# Altium PCB Board_PCB.PcbDoc (part 2 of 3)
Units mm, origin at the board's own origin, x right, y up, seen from the top; angles counter-clockwise.
Board outline 122.55 x 106.6 mm, 2 copper layers (Top Layer, Bottom Layer); 120 components, 188 nets, 670 pads, 282 vias.
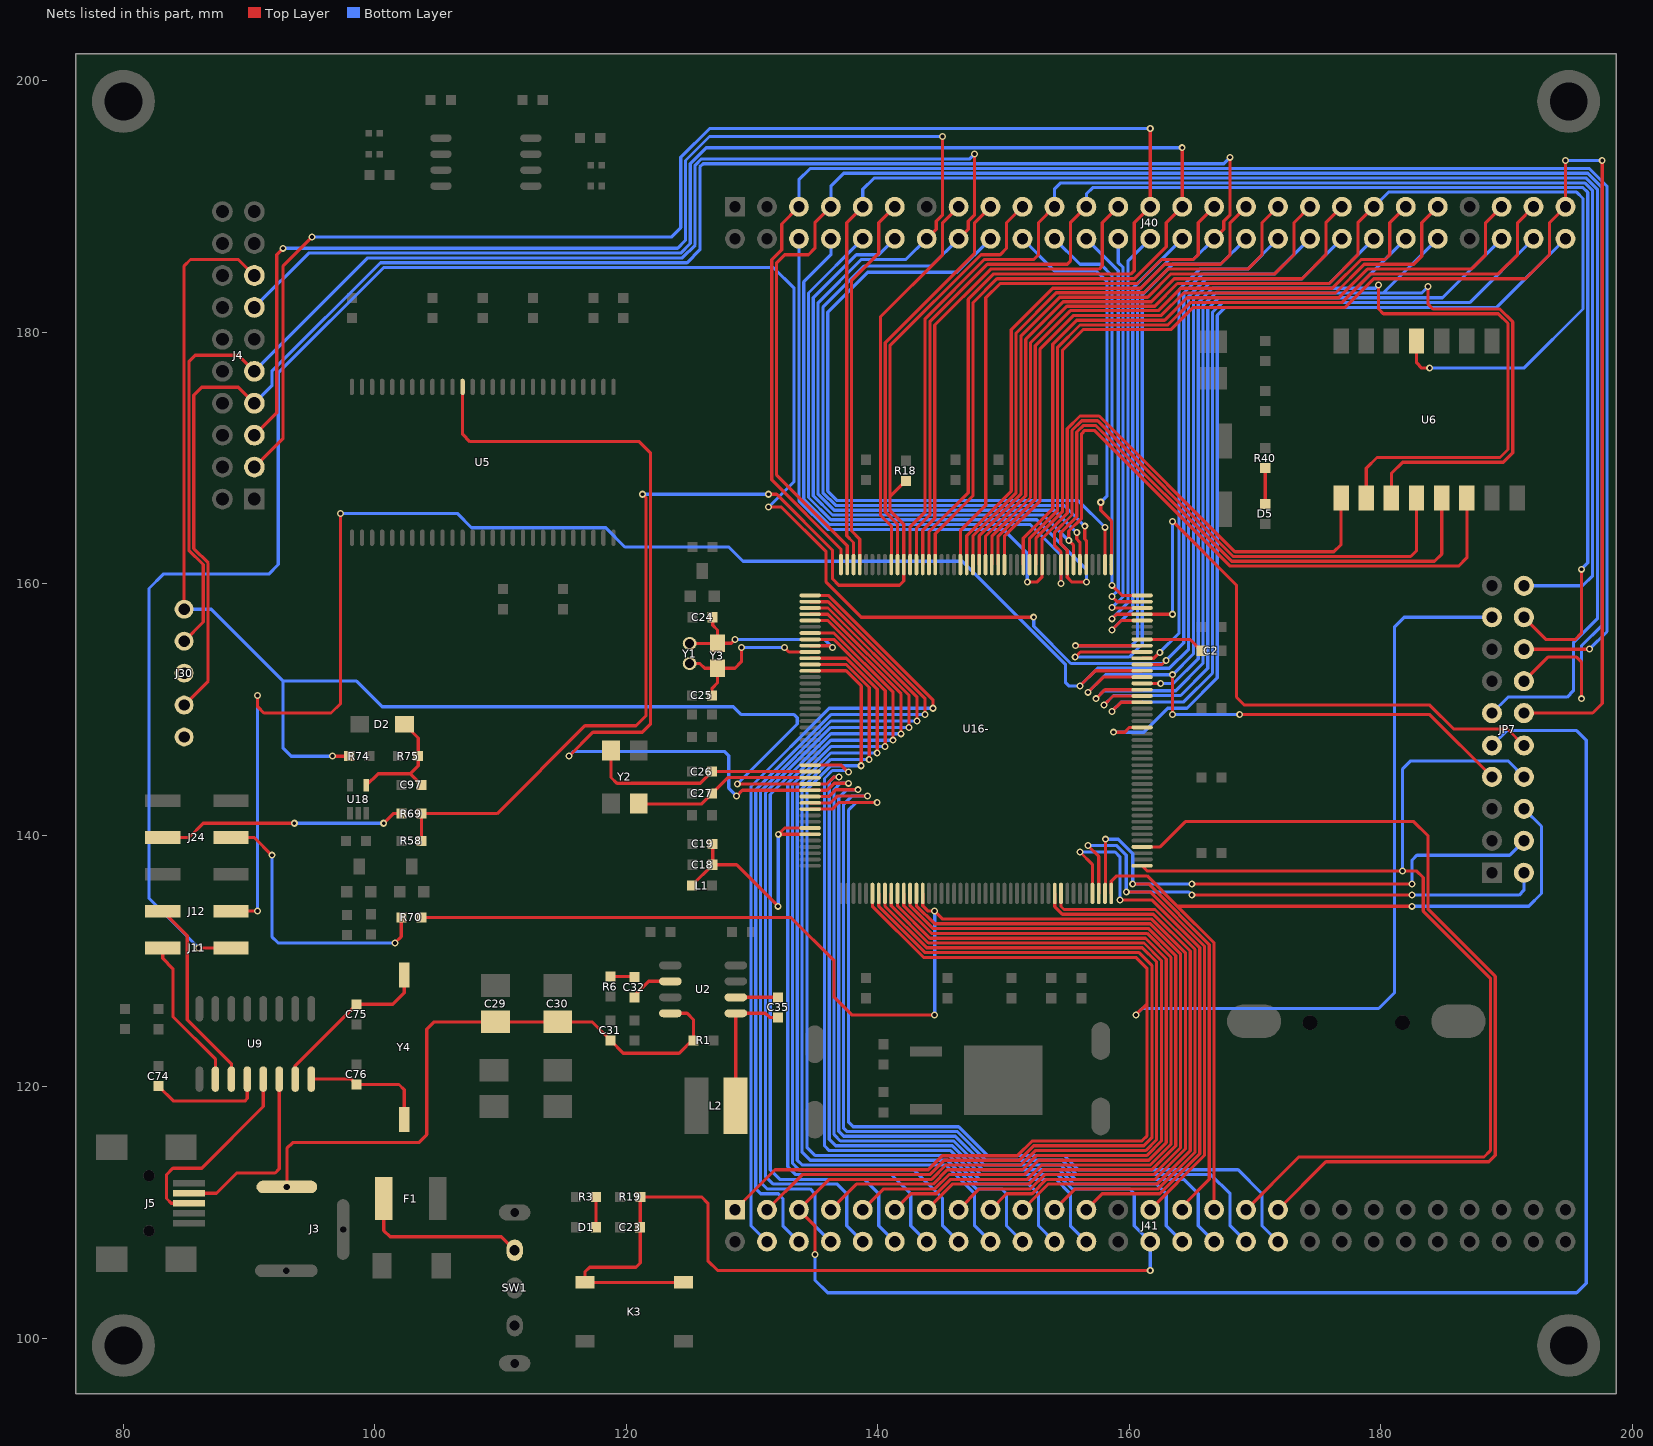
[diagram p2: the nets of this part, all layers, seen from the top]

## Via types
v1: diameter 0.56, hole 0.305, Top Layer to Bottom Layer, tented both sides, 282 vias

## Nets (pads, with @x,y where several pads share a name; then routed paths per layer and width w, separated by ;. In a path a pad name is that pad's centre, name@x,y a point inside that pad or via, vN(x,y) a via of type N, cw(c..) or ccw(c..) an arc to the next point about the centre after c; other vN are vias at no path point) (continued)
NetC2_1: C2.1 U16-.125 | length 5.1
  Top Layer w0.254: U16-.125@161.024,155.59 164.831,155.59 C2.1@165.735,154.686
NetC18_1: C18.1 C19.1 L1.1 U16-.38 U16-.39 | length 21.6
  Top Layer w0.254: L1.1@125.222,136.017 C18.1@126.873,137.668 ; C19.1@126.873,139.319 C18.1@126.873,137.668 ; v1(132.08,134.366) 128.778,137.668 C18.1@126.873,137.668 ; U16-.39@134.624,140.09 v1(132.089,140.09) 132.589,140.59 U16-.38@134.624,140.59
  Bottom Layer w0.254: v1(132.08,134.366) 132.089,134.375 v1(132.089,140.09)
NetC23_2: C23.2 J4.15 J30.1 J41.28 K3.3 K3.4 R19.1 R74.2 U16-.31 | length 238.7
  Top Layer w0.254: J30.1@84.836,157.988 84.836,185.293 85.344,185.801 89.154,185.801 J4.15@90.424,184.531 ; v1(96.647,146.304) R74.2@97.968,146.304 ; R19.1@121.107,111.241 C23.2@121.107,108.839 121.107,105.994 120.777,105.664 117.094,105.664 116.713,105.283 K3.4@116.713,104.458 K3.3@124.562,104.458 ; R19.1@121.118,111.252 125.984,111.252 126.492,110.744 126.492,106.172 127.254,105.41 v1(161.671,105.41) ; v1(128.833,144.09) U16-.31@134.624,144.09 135.962,144.09 136.525,144.653 v1(136.906,144.653)
  Bottom Layer w0.254: J30.1@84.836,157.988 86.995,157.988 92.71,152.273 ; v1(96.647,146.304) 93.345,146.304 92.71,146.939 92.71,152.273 ; v1(128.833,144.09) 133.604,148.861 133.604,149.352 133.349,149.607 129.158,149.607 128.524,150.241 100.584,150.241 98.552,152.273 92.71,152.273 ; v1(136.906,144.653) 136.525,144.653 136.144,144.272 136.144,115.824 136.652,115.316 145.923,115.316 148.209,113.03 154.305,113.03 155.448,111.887 160.02,111.887 160.401,111.506 160.401,108.966 J41.28@161.671,107.696 v1(161.671,105.41)
NetC24_1: C24.1 U16-.9 Y1.2 Y3.2 | length 15.8
  Top Layer w0.254: Y1.2@125.04,155.267 Y3.2@127.232,155.267 ; C24.1@126.873,157.353 126.873,156.718 127.254,156.337 Y3.2@127.254,155.289 128.365,155.289 v1(128.651,155.575) ; U16-.9@134.624,155.09 136.248,155.09 v1(136.398,154.94)
  Bottom Layer w0.254: v1(128.651,155.575) 135.786,155.575 136.398,154.963 v1(136.398,154.94)
NetC25_1: C25.1 U16-.10 Y1.1 Y3.1 | length 13.6
  Top Layer w0.254: Y1.1@125.04,153.667 125.86,153.667 126.238,153.289 Y3.1@127.254,153.289 ; C25.1@126.823,151.13 126.823,151.715 127.254,152.146 Y3.1@127.254,153.289 ; v1(129.159,154.94) 129.159,153.797 128.651,153.289 Y3.1@127.254,153.289 ; v1(132.588,154.94) 132.938,154.59 U16-.10@134.624,154.59
  Bottom Layer w0.254: v1(129.159,154.94) v1(132.588,154.94)
NetC26_2: C26.2 U16-.29 Y2.1 | length 18.5
  Top Layer w0.254: Y2.1@118.788,146.753 118.788,144.61 119.253,144.145 125.887,144.145 C26.2@126.822,145.08 ; C26.2@126.832,145.09 U16-.29@134.624,145.09
NetC27_2: C27.2 U16-.30 Y2.3 | length 14.8
  Top Layer w0.254: Y2.3@120.988,142.494 125.974,142.494 C27.2@126.822,143.342 128.077,144.597 134.624,144.597 U16-.30@134.624,144.59 ; Y2.3@120.988,142.68 Y2.3@121.174,142.494
NetC29_1: C29.1 C30.1 C31.1 J3.1 R1.1 U2.8 | length 49.6
  Top Layer w0.254: J3.1@93.01,112.044 93.01,115.108 93.472,115.57 103.505,115.57 104.14,116.205 104.14,124.587 104.722,125.169 C29.1@109.601,125.169 C30.1@114.554,125.169 117.274,125.169 C31.1@118.745,123.698 119.761,122.682 124.206,122.682 125.349,123.825 125.349,125.349 124.841,125.857 U2.8@123.511,125.857
NetC32_1: C32.1 U2.6 | length 3.5
  Top Layer w0.254: C32.1@120.65,127.127 120.65,127.254 121.793,128.397 U2.6@123.511,128.397
NetC32_2: C32.2 R6.1 | length 1.9
  Top Layer w0.254: R6.1@118.745,128.778 C32.2@120.599,128.778
NetC35_1: C35.1 L2.1 U2.1 | length 10.9
  Top Layer w0.254: L2.1@128.711,118.491 U2.1@128.711,125.857 131.064,125.857 131.395,125.526 C35.1@132.08,125.526
NetC35_2: C35.2 U2.2 | length 3.4
  Top Layer w0.254: U2.2@128.711,127.127 C35.2@132.08,127.126
NetC74_2: C74.2 U9.4 | length 9.2
  Top Layer w0.254: C74.2@82.804,120.066 83.998,118.872 89.662,118.872 89.865,119.075 U9.4@89.865,120.625
NetC75_2: C75.2 U9.7 Y4.2 | length 13.6
  Top Layer w0.254: U9.7@93.675,120.625 93.675,121.691 C75.2@98.552,126.568 101.422,126.568 102.349,127.495 Y4.2@102.349,128.905
NetC76_2: C76.2 U9.8 Y4.1 | length 10.1
  Top Layer w0.254: U9.8@94.945,120.625 98.12,120.625 C76.2@98.552,120.193 101.93,120.193 102.349,119.774 Y4.1@102.349,117.405
NetC97_2: C97.2 D2.1 R75.2 U18.4 | length 9.8
  Top Layer w0.254: U18.4@99.329,143.975 100.261,144.907 102.819,144.907 ; D2.1@102.362,148.844 103.454,147.752 R75.2@103.454,146.304 103.454,145.542 102.819,144.907 ; C97.2@103.708,144.018 102.819,144.907
NetD1_A: D1.A R3.2 | length 2.4
  Top Layer w0.254: D1.A@117.602,108.839 R3.2@117.601,111.252
NetD5_A: D5.A R40.2 | length 2.8
  Top Layer w0.254: D5.A@170.815,166.37 R40.2@170.815,169.215
NetF1_1: F1.1 SW1.3 | length 13.6
  Top Layer w0.254: F1.1@100.72,111.125 100.72,108.576 101.219,108.077 110.061,108.077 SW1.3@111.125,107.013
NetJ4_3: J4.3 J40.27 U16-.162 | length 142.1
  Top Layer w0.254: J4.3@90.424,169.291 92.71,171.577 92.71,185.293 v1(94.996,187.579) ; U16-.162@144.074,161.54 144.074,164.14 147.193,167.259 147.193,182.626 149.225,184.658 160.147,184.658 160.401,184.912 160.401,188.722 J40.27@161.671,189.992 v1(161.671,196.215)
  Bottom Layer w0.254: v1(94.996,187.579) 123.571,187.579 124.333,188.341 124.333,193.929 126.619,196.215 v1(161.671,196.215)
NetJ4_5: J4.5 J40.14 U16-.138 | length 134.8
  Top Layer w0.254: J4.5@90.424,171.831 92.202,173.609 92.202,186.182 v1(92.71,186.69) ; J40.14@143.891,187.452 144.653,188.214 144.653,188.849 145.161,189.357 v1(145.161,195.58) ; v1(155.829,164.084) 155.829,163.576 156.074,163.331 U16-.138@156.074,161.54
  Bottom Layer w0.254: v1(92.71,186.69) 124.079,186.69 124.714,187.325 124.714,193.675 126.619,195.58 v1(145.161,195.58) ; J40.14@143.891,187.452 142.24,185.801 138.684,185.801 135.255,182.372 135.255,167.132 136.525,165.862 154.051,165.862 v1(155.829,164.084)
NetJ4_7: J4.7 J30.4 J40.32 U16-.124 | length 174.7
  Top Layer w0.254: J30.4@84.836,150.368 86.741,152.273 86.741,161.671 85.598,162.814 85.598,175.006 86.233,175.641 89.154,175.641 J4.7@90.424,174.371 ; v1(155.725,155.09) U16-.124@161.024,155.09 ; J40.32@166.751,187.452 167.513,188.214 167.513,188.849 168.021,189.357 v1(168.021,193.929)
  Bottom Layer w0.254: J4.7@90.424,174.371 91.821,175.768 91.821,176.911 100.457,185.547 124.841,185.547 125.857,186.563 125.857,193.167 126.111,193.421 167.513,193.421 v1(168.021,193.929) ; v1(155.725,155.09) 160.17,155.09 160.655,155.575 160.655,183.261 163.195,185.801 165.1,185.801 J40.32@166.751,187.452
NetJ4_9: J4.9 J30.2 J40.16 U16-.137 | length 157.5
  Top Layer w0.254: J30.2@84.836,155.448 86.36,156.972 86.36,161.544 85.217,162.687 85.217,177.673 85.725,178.181 89.154,178.181 J4.9@90.424,176.911 ; J40.16@146.431,187.452 147.193,188.214 147.193,188.849 147.701,189.357 v1(147.701,194.183) ; v1(156.464,164.592) 156.464,163.576 156.591,163.449 U16-.137@156.591,161.557
  Bottom Layer w0.254: J4.9@90.424,176.911 99.441,185.928 124.46,185.928 125.476,186.944 125.476,193.294 125.984,193.802 147.32,193.802 v1(147.701,194.183) ; J40.16@146.431,187.452 144.272,185.293 138.938,185.293 135.636,181.991 135.636,167.259 136.652,166.243 154.813,166.243 v1(156.464,164.592)
NetJ4_13: J4.13 J40.29 U16-.161 | length 130.5
  Top Layer w0.254: U16-.161@144.574,161.54 144.567,161.547 144.567,163.998 147.574,167.005 147.574,182.372 149.479,184.277 160.401,184.277 162.941,186.817 162.941,188.722 J40.29@164.211,189.992 v1(164.211,194.691)
  Bottom Layer w0.254: J4.13@90.424,181.991 94.742,186.309 124.333,186.309 125.095,187.071 125.095,193.421 126.365,194.691 v1(164.211,194.691)
NetJ5_2: J5.2 U9.6 | length 15.1
  Top Layer w0.254: J5.2@85.242,111.544 87.414,111.544 89.027,113.157 92.075,113.157 92.405,113.487 U9.6@92.405,120.625
NetJ5_3: J5.3 U9.5 | length 16
  Top Layer w0.254: J5.3@85.242,110.744 83.82,110.744 83.439,111.125 83.439,113.03 83.947,113.538 86.233,113.538 91.135,118.44 U9.5@91.135,120.625
NetJ11_1: J11.1 J40.38 U16-.121 | length 204.9
  Top Layer w0.254: v1(85.99,131.053) J11.1@88.567,131.053 ; v1(131.318,166.116) 132.334,166.116 135.89,162.56 135.89,160.147 138.684,157.353 v1(152.4,157.353) ; U16-.121@161.024,153.59 162.607,153.59 v1(162.941,153.924)
  Bottom Layer w0.254: v1@85.979,131.064 82.042,135.001 82.042,159.639 83.185,160.782 91.567,160.782 92.329,161.544 92.329,176.784 100.711,185.166 131.699,185.166 133.35,183.515 133.35,168.148 v1(131.318,166.116) ; v1(152.4,157.353) 152.4,156.63 155.36,153.67 162.687,153.67 v1(162.941,153.924) 164.338,155.321 164.338,183.134 165.862,184.658 171.577,184.658 J40.38@174.371,187.452
NetJ11_2: J11.2 U9.2 | length 12.2
  Top Layer w0.254: J11.2@83.137,131.053 83.137,130.223 83.947,129.413 83.947,125.603 87.325,122.225 U9.2@87.325,120.625
NetJ12_1: J12.1 J40.40 U16-.120 | length 165.2
  Top Layer w0.254: J12.1@88.567,133.974 88.556,133.985 v1(90.678,133.985) ; v1(90.678,151.13) 90.678,150.241 91.186,149.733 96.52,149.733 97.282,150.495 v1(97.282,165.608) ; v1(156.083,151.892) 157.281,153.09 U16-.120@161.024,153.09
  Bottom Layer w0.254: v1(90.678,133.985) v1(90.678,151.13) ; v1(97.282,165.608) 106.553,165.608 107.696,164.465 118.364,164.465 119.888,162.941 128.143,162.941 129.286,161.798 146.731,161.798 154.94,153.589 154.94,152.146 155.194,151.892 v1(156.083,151.892) 157.48,153.289 163.195,153.289 164.719,154.813 164.719,182.88 166.116,184.277 173.736,184.277 J40.40@176.911,187.452
NetJ12_2: J12.2 U9.3 | length 15.6
  Top Layer w0.254: J12.2@83.137,133.974 85.09,132.021 85.09,125.349 88.595,121.844 U9.3@88.595,120.625
NetJ24_1: J24.1 R69.2 | length 19.8
  Top Layer w0.254: J24.1@83.137,139.838 85.228,139.838 86.36,140.97 v1(93.599,140.97) ; v1(100.711,140.97) 101.473,141.732 R69.2@102.109,141.732
  Bottom Layer w0.254: v1(93.599,140.97) v1(100.711,140.97)
NetJ24_2: J24.2 R70.1 | length 22.5
  Top Layer w0.254: J24.2@88.567,139.838 90.413,139.838 v1(91.821,138.43) ; v1(101.6,131.445) 102.108,131.953 R70.1@102.108,133.477
  Bottom Layer w0.254: v1(91.821,138.43) 91.821,131.953 92.329,131.445 v1(101.6,131.445)
NetJ30_3: J30.3
NetJ30_5: J30.5
NetJ40_5: J40.5 JP7.16 U16-.176 | length 141.6
  Top Layer w0.254: J40.5@133.731,189.992 132.363,188.624 132.363,186.584 131.572,185.794 131.572,168.275 137.074,162.773 U16-.176@137.074,161.54 ; JP7.16@191.389,154.813 v1(196.596,154.813)
  Bottom Layer w0.254: J40.5@133.731,189.992 133.731,192.151 134.62,193.04 196.596,193.04 197.993,191.643 197.993,156.21 v1(196.596,154.813)
NetJ40_6: J40.6 U6.8 U16-.144 | length 87.6
  Top Layer w0.254: v1(151.892,160.147) 152.654,160.147 153.074,160.567 U16-.144@153.074,161.54 153.074,163.615 155.067,165.608 155.067,172.339 156.083,173.355 157.607,173.355 168.402,162.56 176.276,162.56 176.85,163.134 U6.8@176.85,166.824
  Bottom Layer w0.254: J40.6@133.731,187.452 133.731,166.624 136.017,164.338 149.987,164.338 151.892,162.433 v1(151.892,160.147)
NetJ40_7: J40.7 JP7.14 U16-.175 | length 147.3
  Top Layer w0.254: J40.7@136.271,189.992 135.001,188.722 135.001,186.69 134.493,186.182 132.588,186.182 131.953,185.547 131.953,168.656 137.574,163.035 U16-.175@137.574,161.54 ; JP7.14@191.389,152.273 193.294,154.178 195.58,154.178 195.961,153.797 v1(195.961,150.876)
  Bottom Layer w0.254: J40.7@136.271,189.992 136.271,191.643 137.287,192.659 196.469,192.659 197.612,191.516 197.612,156.718 195.961,155.067 v1(195.961,150.876)
NetJ40_8: J40.8 U6.11 U16-.141 | length 95.7
  Top Layer w0.254: v1(154.574,160.035) U16-.141@154.574,161.54 154.574,162.545 154.051,163.068 154.051,164.084 155.448,165.481 155.448,172.212 156.21,172.974 157.48,172.974 168.275,162.179 182.372,162.179 182.85,162.657 U6.11@182.85,166.824
  Bottom Layer w0.254: J40.8@136.271,187.452 136.271,186.182 134.112,184.023 134.112,166.751 136.144,164.719 152.146,164.719 154.574,162.291 v1(154.574,160.035)
NetJ40_9: J40.9 JP7.11 U16-.174 | length 137.6
  Top Layer w0.254: U16-.174@138.074,161.54 138.074,163.297 137.541,163.83 137.541,188.722 J40.9@138.811,189.992
  Bottom Layer w0.254: J40.9@138.811,189.992 138.811,191.389 139.7,192.278 196.342,192.278 197.231,191.389 197.231,157.226 195.326,155.321 195.326,151.511 194.818,151.003 190.119,151.003 JP7.11@188.849,149.733
NetJ40_10: J40.10 U6.12 U16-.140 | length 100.2
  Top Layer w0.254: v1(156.591,160.147) 155.448,160.147 155.074,160.521 U16-.140@155.074,161.54 155.074,162.68 154.559,163.195 154.559,164.084 155.829,165.354 155.829,172.085 156.337,172.593 157.353,172.593 168.148,161.798 184.277,161.798 184.85,162.371 U6.12@184.85,166.824
  Bottom Layer w0.254: J40.10@138.811,187.452 134.493,183.134 134.493,166.878 136.271,165.1 152.654,165.1 156.591,161.163 v1(156.591,160.147)
NetJ40_11: J40.11 U16-.173 | length 30.1
  Top Layer w0.254: U16-.173@138.574,161.54 138.574,163.559 137.922,164.211 137.922,184.15 140.081,186.309 140.081,188.722 J40.11@141.351,189.992
NetJ40_12: J40.12 U6.13 U16-.139 | length 97.2
  Top Layer w0.254: U16-.139@155.575,161.541 155.575,163.068 v1(155.194,163.449) 155.194,164.211 156.21,165.227 156.21,171.958 156.464,172.212 157.226,172.212 168.021,161.417 186.182,161.417 186.85,162.085 U6.13@186.85,166.824
  Bottom Layer w0.254: J40.12@141.351,187.452 140.081,186.182 138.303,186.182 134.874,182.753 134.874,167.005 136.398,165.481 153.162,165.481 v1(155.194,163.449)
NetJ40_15: J40.15 U16-.168 | length 31.4
  Top Layer w0.254: U16-.168@141.074,161.54 141.096,161.562 141.096,164.593 140.208,165.481 140.208,181.229 145.161,186.182 145.161,188.722 J40.15@146.431,189.992
NetJ40_17: J40.17 U16-.167 | length 32.3
  Top Layer w0.254: U16-.167@141.574,161.54 141.574,164.75 140.589,165.735 140.589,179.197 147.701,186.309 147.701,188.722 J40.17@148.971,189.992
NetJ40_18: J40.18 U16-.134 | length 55.8
  Top Layer w0.254: U16-.134@158.074,161.54 v1(158.074,164.506)
  Bottom Layer w0.254: J40.18@148.971,187.452 146.304,184.785 139.192,184.785 136.017,181.61 136.017,167.386 136.779,166.624 155.956,166.624 v1(158.074,164.506)
NetJ40_19: J40.19 R18.2 R58.2 R69.1 U16-.166 | length 103.5
  Top Layer w0.254: R58.2@103.708,139.573 R69.1@103.709,141.732 109.728,141.732 116.713,148.717 120.777,148.717 121.566,149.506 121.566,166.851 v1(121.285,167.132) ; v1(131.318,167.132) 131.953,167.132 136.398,162.687 136.398,160.401 136.906,159.893 141.732,159.893 142.074,160.235 U16-.166@142.074,161.54 142.074,164.758 140.97,165.862 140.97,166.929 ; R18.2@142.24,168.199 140.97,166.929 ; J40.19@151.511,189.992 150.241,188.722 150.241,186.69 149.733,186.182 148.209,186.182 140.97,178.943 140.97,166.929
  Bottom Layer w0.254: v1(121.285,167.132) v1(131.318,167.132)
NetJ40_20: J40.20 U16-.133 | length 31.2
  Top Layer w0.254: v1(157.734,166.497) 157.734,165.862 158.581,165.015 158.581,161.547 U16-.133@158.574,161.54
  Bottom Layer w0.254: J40.20@151.511,187.452 154.051,184.912 157.353,184.912 158.242,184.023 158.242,167.005 v1(157.734,166.497)
NetJ40_21: J40.21 JP7.20 U16-.165 | length 116.6
  Top Layer w0.254: U16-.165@142.574,161.54 142.574,164.545 143.764,165.735 143.764,181.102 148.463,185.801 152.4,185.801 152.781,186.182 152.781,188.722 J40.21@154.051,189.992
  Bottom Layer w0.254: J40.21@154.051,189.992 154.051,191.389 154.559,191.897 196.215,191.897 196.85,191.262 196.85,160.655 196.048,159.853 JP7.20@191.389,159.853
NetJ40_22: J40.22 U16-.132 | length 33.2
  Top Layer w0.254: v1(158.623,159.893) 159.426,159.09 U16-.132@161.024,159.09
  Bottom Layer w0.254: J40.22@154.051,187.452 156.083,185.42 157.734,185.42 158.623,184.531 v1(158.623,159.893)
NetJ40_23: J40.23 JP7.18 U16-.164 | length 119.8
  Top Layer w0.254: U16-.164@143.074,161.54 143.074,164.41 144.145,165.481 144.145,180.848 148.717,185.42 155.067,185.42 155.321,185.674 155.321,188.722 J40.23@156.591,189.992 ; JP7.18@191.389,157.353 193.167,155.575 195.453,155.575 195.961,156.083 v1(195.961,161.163)
  Bottom Layer w0.254: J40.23@156.591,189.992 156.591,191.008 157.099,191.516 196.088,191.516 196.469,191.135 196.469,161.671 v1(195.961,161.163)
NetJ40_24: J40.24 U16-.131 | length 32.3
  Top Layer w0.254: v1(158.623,159.004) 159.037,158.59 U16-.131@161.024,158.59
  Bottom Layer w0.254: J40.24@156.591,187.452 159.131,184.912 159.131,159.512 v1(158.623,159.004)
NetJ40_25: J40.25 U16-.163 | length 40
  Top Layer w0.254: U16-.163@143.574,161.54 143.574,164.275 144.526,165.227 144.526,180.594 148.971,185.039 157.607,185.039 157.861,185.293 157.861,188.722 J40.25@159.131,189.992
NetJ40_26: J40.26 U16-.130 | length 32.2
  Top Layer w0.254: v1@158.648,158.09 U16-.130@161.024,158.09
  Bottom Layer w0.254: v1(158.623,158.115) 159.512,159.004 159.512,185.166 159.131,185.547 J40.26@159.131,187.452
NetJ40_28: J40.28 JP7.10 U16-.129 | length 84.4
  Top Layer w0.254: v1(158.623,157.226) 158.987,157.59 U16-.129@161.024,157.59 v1(163.432,157.59) ; v1(163.449,164.973) 168.529,159.893 168.529,151.003 169.164,150.368 183.896,150.368 185.801,148.463 190.079,148.463 JP7.10@191.389,147.153
  Bottom Layer w0.254: v1(158.623,157.226) 159.893,158.496 159.893,185.674 J40.28@161.671,187.452 ; v1(163.432,157.59) 163.449,157.607 v1(163.449,164.973)
NetJ40_30: J40.30 U16-.128 | length 36.1
  Top Layer w0.254: v1(158.623,156.337) 159.376,157.09 U16-.128@161.024,157.09
  Bottom Layer w0.254: v1(158.623,156.337) 160.274,157.988 160.274,183.515 J40.30@164.211,187.452
NetJ40_31: J40.31 U16-.157 | length 44.7
  Top Layer w0.254: U16-.157@146.574,161.54 146.574,164.227 148.59,166.243 148.59,182.753 149.733,183.896 160.655,183.896 162.56,185.801 165.1,185.801 165.481,186.182 165.481,188.722 J40.31@166.751,189.992
NetJ40_33: J40.33 U16-.156 | length 44.4
  Top Layer w0.254: U16-.156@147.074,161.54 147.074,163.838 150.622,167.386 150.622,180.213 153.924,183.515 160.909,183.515 162.814,185.42 167.259,185.42 168.021,186.182 168.021,188.722 J40.33@169.291,189.992
NetJ40_34: J40.34 U16-.123 | length 49.4
  Top Layer w0.254: v1(155.702,154.178) 156.114,154.59 U16-.123@161.024,154.59
  Bottom Layer w0.254: v1(155.702,154.178) 159.989,154.178 161.036,155.225 161.036,183.007 163.449,185.42 167.259,185.42 J40.34@169.291,187.452 J40.34@169.291,187.198
NetJ40_35: J40.35 U16-.155 | length 46.3
  Top Layer w0.254: U16-.155@147.574,161.54 147.574,163.83 151.003,167.259 151.003,179.959 154.197,183.153 161.175,183.153 163.061,185.039 169.418,185.039 170.561,186.182 170.561,188.722 J40.35@171.831,189.992
NetJ40_36: J40.36 U16-.122 | length 40.6
  Top Layer w0.254: U16-.122@161.024,154.09 161.964,154.09 v1(162.433,154.559)
  Bottom Layer w0.254: v1(162.433,154.559) 163.957,156.083 163.957,183.388 165.608,185.039 169.418,185.039 J40.36@171.831,187.452
NetJ40_37: J40.37 U16-.154 | length 48.3
  Top Layer w0.254: U16-.154@148.074,161.54 148.074,163.822 151.384,167.132 151.384,179.705 154.478,182.799 161.463,182.799 163.322,184.658 171.577,184.658 173.101,186.182 173.101,188.722 J40.37@174.371,189.992
NetJ40_39: J40.39 U16-.153 | length 50.2
  Top Layer w0.254: U16-.153@148.574,161.54 148.574,163.814 151.765,167.005 151.765,179.451 154.759,182.445 161.744,182.445 163.576,184.277 173.736,184.277 175.641,186.182 175.641,188.722 J40.39@176.911,189.992
NetJ40_41: J40.41 U6.4 U16-.152 | length 95.4
  Top Layer w0.254: U16-.152@149.074,161.54 149.074,163.806 152.146,166.878 152.146,179.197 155.04,182.091 162.025,182.091 163.83,183.896 175.895,183.896 178.181,186.182 178.181,188.722 J40.41@179.451,189.992 ; U6.4@182.85,179.324 182.85,177.576 183.261,177.165 v1(183.896,177.165)
  Bottom Layer w0.254: J40.41@179.451,189.992 180.621,191.162 195.58,191.162 196.088,190.654 196.088,181.864 191.389,177.165 v1(183.896,177.165)
NetJ40_42: J40.42 JP7.7 U16-.119 | length 89.6
  Top Layer w0.254: v1(156.718,151.384) 157.924,152.59 U16-.119@161.024,152.59 ; v1(163.449,149.606) v1(163.449,152.781) ; v1(168.783,149.606) 183.896,149.606 JP7.7@188.849,144.653
  Bottom Layer w0.254: v1(156.718,151.384) 158.115,152.781 v1(163.449,152.781) 165.1,154.432 165.1,182.626 166.37,183.896 175.895,183.896 J40.42@179.451,187.452 ; v1(163.449,149.606) v1(168.783,149.606)
NetJ40_43: J40.43 U16-.151 | length 54.2
  Top Layer w0.254: U16-.151@149.574,161.54 149.574,163.798 152.527,166.751 152.527,178.943 155.321,181.737 162.306,181.737 164.084,183.515 176.149,183.515 178.435,185.801 180.34,185.801 180.721,186.182 180.721,188.722 J40.43@181.991,189.992
NetJ40_44: J40.44 U6.9 U16-.118 | length 91
  Top Layer w0.254: U16-.118@161.024,152.09 v1(162.504,152.09) ; U6.9@178.85,166.824 178.85,169.198 179.705,170.053 189.484,170.053 190.119,170.688 190.119,180.721 189.357,181.483 180.213,181.483 179.832,181.864 v1(179.832,183.769)
  Bottom Layer w0.254: v1(162.504,152.09) 163.52,152.09 165.481,154.051 165.481,182.372 166.624,183.515 178.054,183.515 ; v1(179.832,183.769) 179.578,183.515 178.054,183.515 ; J40.44@181.991,187.452 178.054,183.515
NetJ40_45: J40.45 U16-.150 | length 56.2
  Top Layer w0.254: U16-.150@150.074,161.54 150.074,163.79 152.908,166.624 152.908,178.689 155.575,181.356 162.56,181.356 164.338,183.134 176.403,183.134 178.689,185.42 182.626,185.42 183.261,186.055 183.261,188.722 J40.45@184.531,189.992
NetJ40_46: J40.46 U6.10 U16-.117 | length 98.1
  Top Layer w0.254: v1(157.353,150.876) 158.067,151.59 U16-.117@161.024,151.59 ; U6.10@180.85,166.824 180.85,168.785 181.737,169.672 189.738,169.672 190.5,170.434 190.5,180.841 189.477,181.864 184.15,181.864 183.769,182.245 v1(183.769,183.642)
  Bottom Layer w0.254: v1(157.353,150.876) 157.988,151.511 163.703,151.511 165.862,153.67 165.862,182.118 166.878,183.134 180.213,183.134 ; v1(183.769,183.642) 183.261,183.134 180.213,183.134 ; J40.46@184.531,187.452 180.213,183.134
NetJ40_49: J40.49 U16-.147 | length 60.2
  Top Layer w0.254: U16-.147@151.574,161.54 151.574,163.639 153.924,165.989 153.924,179.07 155.829,180.975 162.814,180.975 164.592,182.753 176.657,182.753 178.943,185.039 187.198,185.039 188.341,186.182 188.341,188.722 J40.49@189.611,189.992
NetJ40_50: J40.50 U16-.116 | length 67.1
  Top Layer w0.254: v1(157.988,150.368) 158.71,151.09 U16-.116@161.024,151.09
  Bottom Layer w0.254: v1(157.988,150.368) 158.75,151.13 164.084,151.13 166.243,153.289 166.243,181.864 167.132,182.753 184.912,182.753 J40.50@189.611,187.452
NetJ40_51: J40.51 U16-.146 | length 62.2
  Top Layer w0.254: U16-.146@152.074,161.54 152.074,163.631 154.305,165.862 154.305,178.816 156.083,180.594 163.068,180.594 164.846,182.372 176.911,182.372 179.197,184.658 189.357,184.658 190.881,186.182 190.881,188.722 J40.51@192.151,189.992
NetJ40_52: J40.52 U16-.115 | length 68.6
  Top Layer w0.254: v1(158.623,149.86) 159.353,150.59 U16-.115@161.024,150.59
  Bottom Layer w0.254: v1(158.623,149.86) 159.385,150.622 164.338,150.622 166.624,152.908 166.624,181.61 167.386,182.372 187.071,182.372 J40.52@192.151,187.452
NetJ40_53: J40.53 JP7.12 U16-.145 | length 120.4
  Top Layer w0.254: U16-.145@152.574,161.54 152.574,163.623 154.686,165.735 154.686,178.562 156.364,180.24 163.349,180.24 165.1,181.991 177.165,181.991 179.451,184.277 191.516,184.277 193.421,186.182 193.421,188.722 J40.53@194.691,189.992 v1(194.691,193.675) ; JP7.12@191.389,149.733 196.85,149.733 197.612,150.495 v1(197.612,193.675)
  Bottom Layer w0.254: v1(194.691,193.675) v1(197.612,193.675)
NetJ40_54: J40.54 U16-.111 | length 71.5
  Top Layer w0.254: v1(158.75,148.209) 159.639,148.209 160.02,148.59 U16-.111@161.024,148.59
  Bottom Layer w0.254: v1(158.75,148.209) 161.163,148.209 163.068,150.114 164.592,150.114 167.005,152.527 167.005,181.356 167.64,181.991 189.23,181.991 J40.54@194.691,187.452
NetJ41_1: J41.1 JP7.17 U16-.50 | length 133.1
  Top Layer w0.254: J41.1@128.651,110.236 131.826,113.411 144.025,113.411 145.141,114.527 151.103,114.527 152.273,115.697 160.989,115.697 161.417,116.125 161.417,126.619 ; U16-.50@139.574,135.39 139.574,134.365 143.637,130.302 160.528,130.302 161.417,129.413 161.417,126.619 ; v1(160.528,125.73) 161.417,126.619
  Bottom Layer w0.254: v1(160.528,125.73) 161.036,126.238 179.832,126.238 181.102,127.508 181.102,156.591 181.864,157.353 JP7.17@188.849,157.353
NetJ41_3: J41.3 U16-.51 | length 71.4
  Top Layer w0.254: J41.3@131.191,110.236 133.985,113.03 144.145,113.03 145.288,114.173 151.257,114.173 152.4,115.316 161.163,115.316 161.798,115.951 161.798,129.667 160.782,130.683 143.771,130.683 140.074,134.38 U16-.51@140.074,135.39
NetJ41_4: J41.4 U16-.1 | length 67.6
  Top Layer w0.254: U16-.1@134.624,159.09 136.058,159.09 144.399,150.749 v1(144.399,150.114)
  Bottom Layer w0.254: J41.4@131.191,107.696 129.921,108.966 129.921,143.891 136.144,150.114 v1(144.399,150.114)
NetJ41_5: J41.5 JP7.9 U16-.52 | length 189
  Top Layer w0.254: v1(135.001,106.68) 135.001,108.966 J41.5@133.731,110.236 136.144,112.649 144.279,112.649 145.422,113.792 151.384,113.792 152.527,114.935 161.297,114.935 162.179,115.817 162.179,129.936 161.051,131.064 143.891,131.064 140.574,134.381 U16-.52@140.574,135.39
  Bottom Layer w0.254: v1(135.001,106.68) 135.001,104.648 136.017,103.632 195.58,103.632 196.342,104.394 196.342,147.574 195.58,148.336 190.032,148.336 JP7.9@188.849,147.153
NetJ41_6: J41.6 U16-.2 | length 67.7
  Top Layer w0.254: U16-.2@134.624,158.583 U16-.2@134.624,158.59 136.05,158.59 143.764,150.876 v1(143.764,149.606)
  Bottom Layer w0.254: J41.6@133.731,107.696 132.461,108.966 132.461,111.125 132.08,111.506 130.683,111.506 130.302,111.887 130.302,143.637 136.271,149.606 v1(143.764,149.606)
NetJ41_7: J41.7 U16-.53 | length 67.2
  Top Layer w0.254: J41.7@136.271,110.236 138.303,112.268 144.399,112.268 145.542,113.411 151.511,113.411 152.654,114.554 161.417,114.554 162.56,115.697 162.56,130.055 161.17,131.445 144.025,131.445 141.074,134.396 U16-.53@141.074,135.39
NetJ41_8: J41.8 U16-.3 | length 68.2
  Top Layer w0.254: U16-.3@134.624,158.09 136.042,158.09 143.129,151.003 v1(143.129,149.098)
  Bottom Layer w0.254: J41.8@136.271,107.696 135.001,108.966 135.001,111.506 134.62,111.887 131.191,111.887 130.683,112.395 130.683,143.51 136.271,149.098 v1(143.129,149.098)
NetJ41_9: J41.9 U16-.54 | length 65.1
  Top Layer w0.254: J41.9@138.811,110.236 140.462,111.887 144.526,111.887 145.669,113.03 151.638,113.03 152.781,114.173 161.544,114.173 162.941,115.57 162.941,130.175 161.29,131.826 144.145,131.826 141.574,134.397 U16-.54@141.574,135.39
NetJ41_10: J41.10 U16-.4 | length 68.6
  Top Layer w0.254: U16-.4@134.624,157.569 U16-.4@134.624,157.59 136.034,157.59 142.494,151.13 v1(142.494,148.59)
  Bottom Layer w0.254: J41.10@138.811,107.696 137.541,108.966 137.541,111.506 136.779,112.268 131.699,112.268 131.064,112.903 131.064,143.383 136.271,148.59 v1(142.494,148.59)
NetJ41_11: J41.11 U16-.55 | length 62.9
  Top Layer w0.254: J41.11@141.351,110.236 142.621,111.506 144.653,111.506 145.796,112.649 151.892,112.649 153.035,113.792 161.678,113.792 163.322,115.436 163.322,130.302 161.417,132.207 144.272,132.207 142.074,134.405 U16-.55@142.074,135.39
NetJ41_12: J41.12 U16-.5 | length 68.9
  Top Layer w0.254: U16-.5@134.624,157.062 U16-.5@134.624,157.09 136.026,157.09 141.859,151.257 v1(141.859,148.082)
  Bottom Layer w0.254: J41.12@141.351,107.696 140.081,108.966 140.081,111.506 138.938,112.649 132.207,112.649 131.445,113.411 131.445,143.256 136.271,148.082 v1(141.859,148.082)
NetJ41_13: J41.13 U16-.56 | length 60.8
  Top Layer w0.254: U16-.56@142.574,135.39 142.574,134.413 144.399,132.588 161.544,132.588 163.703,130.429 163.703,115.316 161.798,113.411 153.162,113.411 152.019,112.268 145.923,112.268 J41.13@143.891,110.236
NetJ41_14: J41.14 U16-.7 | length 67.7
  Top Layer w0.254: U16-.7@134.624,156.09 136.518,156.09 141.224,151.384 v1(141.224,147.574)
  Bottom Layer w0.254: v1(141.224,147.574) 136.271,147.574 132.842,144.145 132.842,113.665 133.477,113.03 141.097,113.03 142.621,111.506 142.621,108.966 J41.14@143.891,107.696
NetJ41_15: J41.15 U16-.57 | length 58.7
  Top Layer w0.254: U16-.57@143.074,135.39 143.074,134.414 144.519,132.969 161.671,132.969 164.084,130.556 164.084,115.182 161.932,113.03 153.289,113.03 152.146,111.887 148.082,111.887 J41.15@146.431,110.236
NetJ41_16: J41.16 U16-.8 | length 67.9
  Top Layer w0.254: U16-.8@134.624,155.59 136.51,155.59 140.589,151.511 v1(140.589,147.066)
  Bottom Layer w0.254: v1(140.589,147.066) 136.271,147.066 133.223,144.018 133.223,113.919 133.731,113.411 142.875,113.411 145.161,111.125 145.161,108.966 J41.16@146.431,107.696
NetJ41_17: J41.17 R70.2 U16-.58 | length 110.5
  Top Layer w0.254: R70.2@103.708,133.477 133.096,133.477 136.525,130.048 136.525,127.127 137.922,125.73 v1(144.526,125.73) ; U16-.58@143.574,135.39 143.574,134.414 144.003,133.985 v1(144.526,133.985) 145.161,133.35 161.798,133.35 164.465,130.683 164.465,115.062 162.052,112.649 153.416,112.649 152.273,111.506 150.241,111.506 J41.17@148.971,110.236
  Bottom Layer w0.254: v1(144.526,125.73) v1(144.526,133.985)
NetJ41_18: J41.18 U16-.11 | length 68.1
  Top Layer w0.254: U16-.11@134.624,154.09 137.502,154.09 139.954,151.638 v1(139.954,146.558)
  Bottom Layer w0.254: v1(139.954,146.558) 136.271,146.558 133.604,143.891 133.604,114.173 133.985,113.792 145.415,113.792 147.701,111.506 147.701,108.966 J41.18@148.971,107.696
NetJ41_19: J41.19 U16-.79 | length 44.5
  Top Layer w0.254: J41.19@151.511,110.236 153.543,112.268 162.201,112.268 164.846,114.913 164.846,130.81 161.925,133.731 154.686,133.731 154.074,134.343 U16-.79@154.074,135.39
NetJ41_20: J41.20 U16-.12 | length 68.4
  Top Layer w0.254: U16-.12@134.624,153.59 137.494,153.59 139.32,151.764 v1(139.32,146.049)
  Bottom Layer w0.254: v1(139.32,146.049) 136.27,146.049 133.985,143.764 133.985,114.808 134.62,114.173 145.542,114.173 147.828,111.887 149.86,111.887 150.241,111.506 150.241,108.966 J41.20@151.511,107.696
NetJ41_21: J41.21 U16-.80 | length 42.3
  Top Layer w0.254: J41.21@154.051,110.236 155.702,111.887 162.321,111.887 165.227,114.793 165.227,130.937 162.052,134.112 154.813,134.112 154.574,134.351 U16-.80@154.574,135.39
NetJ41_22: J41.22 U16-.13 | length 68.7
  Top Layer w0.254: U16-.13@134.624,153.09 137.486,153.09 138.684,151.892 v1(138.684,145.542)
  Bottom Layer w0.254: v1(138.684,145.542) 136.271,145.542 134.366,143.637 134.366,115.189 135.001,114.554 145.669,114.554 147.955,112.268 152.019,112.268 152.781,111.506 152.781,108.966 J41.22@154.051,107.696
NetJ41_23: J41.23 U16-.85 | length 45.6
  Top Layer w0.254: v1(156.083,138.684) 157.074,137.693 U16-.85@157.074,135.39 ; J41.23@156.591,110.236 157.861,111.506 162.44,111.506 165.608,114.674 165.608,131.064 161.798,134.874 v1(159.258,134.874)
  Bottom Layer w0.254: v1(156.083,138.684) 158.877,138.684 159.258,138.303 v1(159.258,134.874)
NetJ41_24: J41.24 U16-.28 | length 60.2
  Top Layer w0.254: U16-.28@134.624,145.59 137.112,145.59 v1(137.668,145.034)
  Bottom Layer w0.254: v1(137.668,145.034) 137.542,145.16 136.397,145.16 135.763,144.526 135.763,115.316 136.144,114.935 145.796,114.935 148.082,112.649 154.178,112.649 155.321,111.506 155.321,108.966 J41.24@156.591,107.696
NetJ41_27: J41.27 JP7.2 U16-.86 | length 74.5
  Top Layer w0.254: v1(156.718,139.192) 157.574,138.336 U16-.86@157.574,135.39 ; v1(159.766,135.509) 161.671,135.509 165.989,131.191 165.989,114.554 J41.27@161.671,110.236 ; v1(164.973,135.255) v1(182.499,135.255)
  Bottom Layer w0.254: v1(156.718,139.192) 159.004,139.192 159.766,138.43 v1(159.766,135.509) 164.719,135.509 v1(164.973,135.255) ; v1(182.499,135.255) 191.008,135.255 191.389,135.636 JP7.2@191.389,137.033
NetJ41_29: J41.29 JP7.4 U16-.87 | length 73.1
  Top Layer w0.254: U16-.87@158.074,135.39 158.115,135.431 v1(158.115,139.7) ; v1(160.274,136.144) 161.544,136.144 166.37,131.318 166.37,112.649 164.211,110.49 J41.29@164.211,110.236 ; v1(164.973,136.144) v1(182.499,136.144)
  Bottom Layer w0.254: v1(158.115,139.7) 159.131,139.7 160.274,138.557 v1(160.274,136.144) v1(164.973,136.144) ; v1(182.499,136.144) 182.499,138.049 182.88,138.43 190.246,138.43 JP7.4@191.389,139.573
NetJ41_30: J41.30 U5.16 U16-.32 | length 135.7
  Top Layer w0.254: U5.16@106.985,175.672 106.985,171.907 107.569,171.323 121.031,171.323 121.92,170.434 121.92,148.844 121.285,148.209 117.348,148.209 v1(115.443,146.304) ; v1(128.778,143.129) 129.239,143.59 U16-.32@134.624,143.59 135.97,143.59 136.525,144.145 v1(137.668,144.145)
  Bottom Layer w0.254: v1(115.443,146.304) 115.824,146.685 127.789,146.685 128.143,146.331 128.143,143.764 v1(128.778,143.129) ; v1(137.668,144.145) 137.033,144.145 136.525,143.637 136.525,116.205 137.033,115.697 146.05,115.697 148.336,113.411 154.432,113.411 155.575,112.268 162.179,112.268 162.941,111.506 162.941,108.966 J41.30@164.211,107.696
NetJ41_31: J41.31 JP7.6 U16-.88 | length 69.4
  Top Layer w0.254: U16-.88@158.574,135.39 158.574,136.349 159.004,136.779 161.417,136.779 163.83,134.366 ; J41.31@166.751,110.236 166.751,131.445 163.83,134.366 ; v1(182.499,134.366) 163.83,134.366
  Bottom Layer w0.254: v1(182.499,134.366) 191.77,134.366 192.786,135.382 192.786,140.716 JP7.6@191.389,142.113
NetJ41_32: J41.32 U16-.33 | length 67.3
  Top Layer w0.254: U16-.33@134.624,143.09 136.105,143.09 136.652,143.637 v1(138.43,143.637)
  Bottom Layer w0.254: v1(138.43,143.637) 137.541,143.637 136.906,143.002 136.906,116.459 137.287,116.078 146.177,116.078 148.463,113.792 154.559,113.792 155.702,112.649 164.338,112.649 165.481,111.506 165.481,108.966 J41.32@166.751,107.696
NetJ41_33: J41.33 JP7.8 U16-.89 | length 86.6
  Top Layer w0.254: U16-.89@161.024,137.59 161.454,137.16 v1(181.737,137.16) 182.88,137.16 183.388,136.652 183.388,133.985 188.722,128.651 188.722,114.935 188.214,114.427 173.482,114.427 J41.33@169.291,110.236
  Bottom Layer w0.254: v1(181.737,137.16) 181.737,145.288 182.372,145.923 190.119,145.923 JP7.8@191.389,144.653
NetJ41_34: J41.34 U16-.34 | length 70
  Top Layer w0.254: U16-.34@134.624,142.59 136.24,142.59 136.779,143.129 v1(139.192,143.129)
  Bottom Layer w0.254: v1(139.192,143.129) 137.922,143.129 137.287,142.494 137.287,116.713 137.541,116.459 146.304,116.459 148.59,114.173 154.686,114.173 155.829,113.03 166.497,113.03 168.021,111.506 168.021,108.966 J41.34@169.291,107.696
NetJ41_35: J41.35 U16-.92 | length 70.7
  Top Layer w0.254: U16-.92@161.024,139.09 162.458,139.09 164.465,141.097 182.626,141.097 183.769,139.954 183.769,134.119 189.103,128.785 189.103,114.554 188.595,114.046 175.641,114.046 J41.35@171.831,110.236
NetJ41_36: J41.36 U16-.35 | length 72.5
  Top Layer w0.254: U16-.35@134.624,142.09 136.375,142.09 136.906,142.621 v1(139.954,142.621)
  Bottom Layer w0.254: v1(139.954,142.621) 138.303,142.621 137.669,141.987 137.669,117.22 138.049,116.84 146.431,116.84 148.717,114.554 154.813,114.554 155.956,113.411 168.656,113.411 170.561,111.506 170.561,108.966 J41.36@171.831,107.696